# Altium PCB SM_thruster_ctrl_and_pressure_sensor.PcbDoc
Units mm, origin at the board's own origin, x right, y up, seen from the top; angles counter-clockwise.
Board outline 53.85 x 64.14 mm, 2 copper layers (Top Layer, Bottom Layer); 28 components, 25 nets, 116 pads, 10 vias.
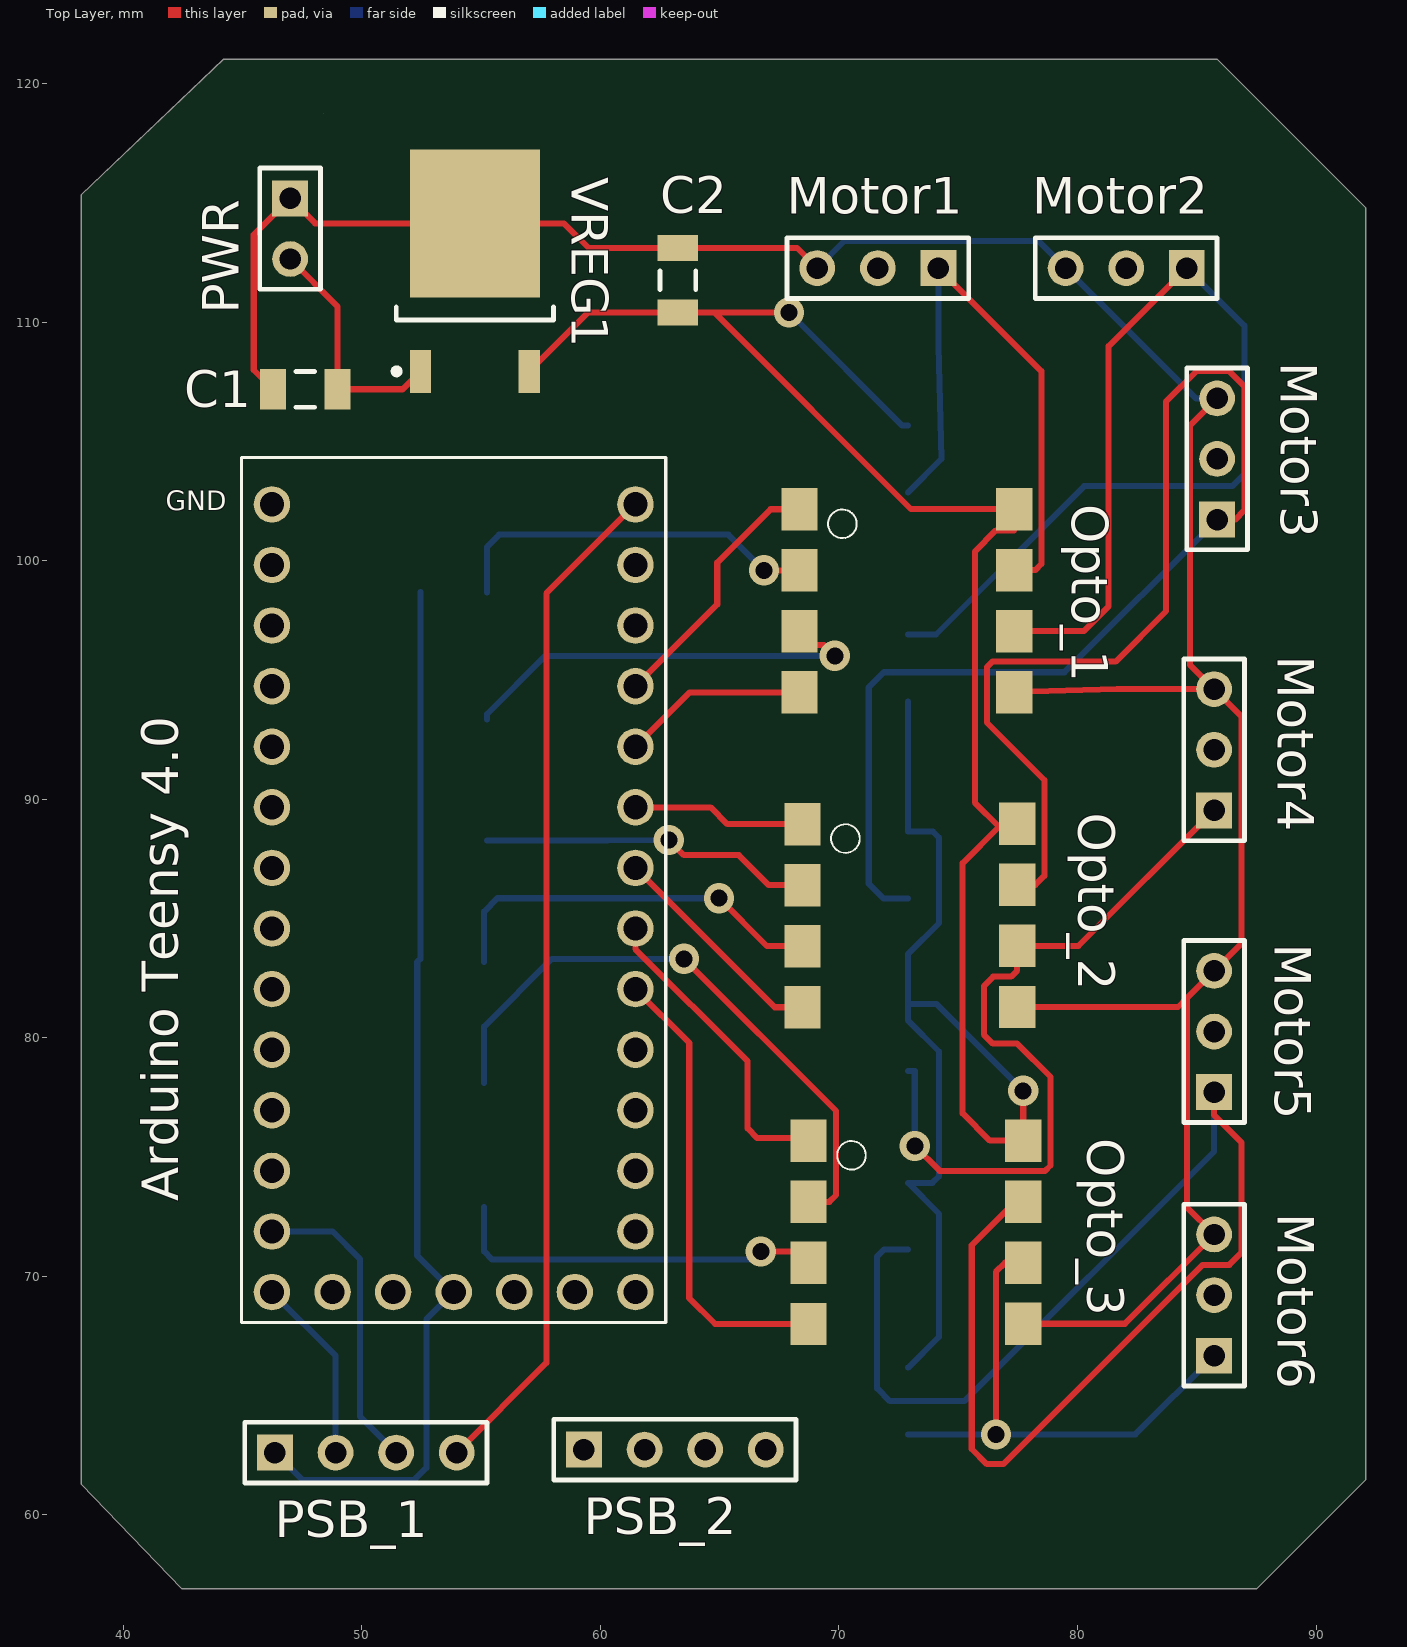
[diagram p0: Top Layer view]
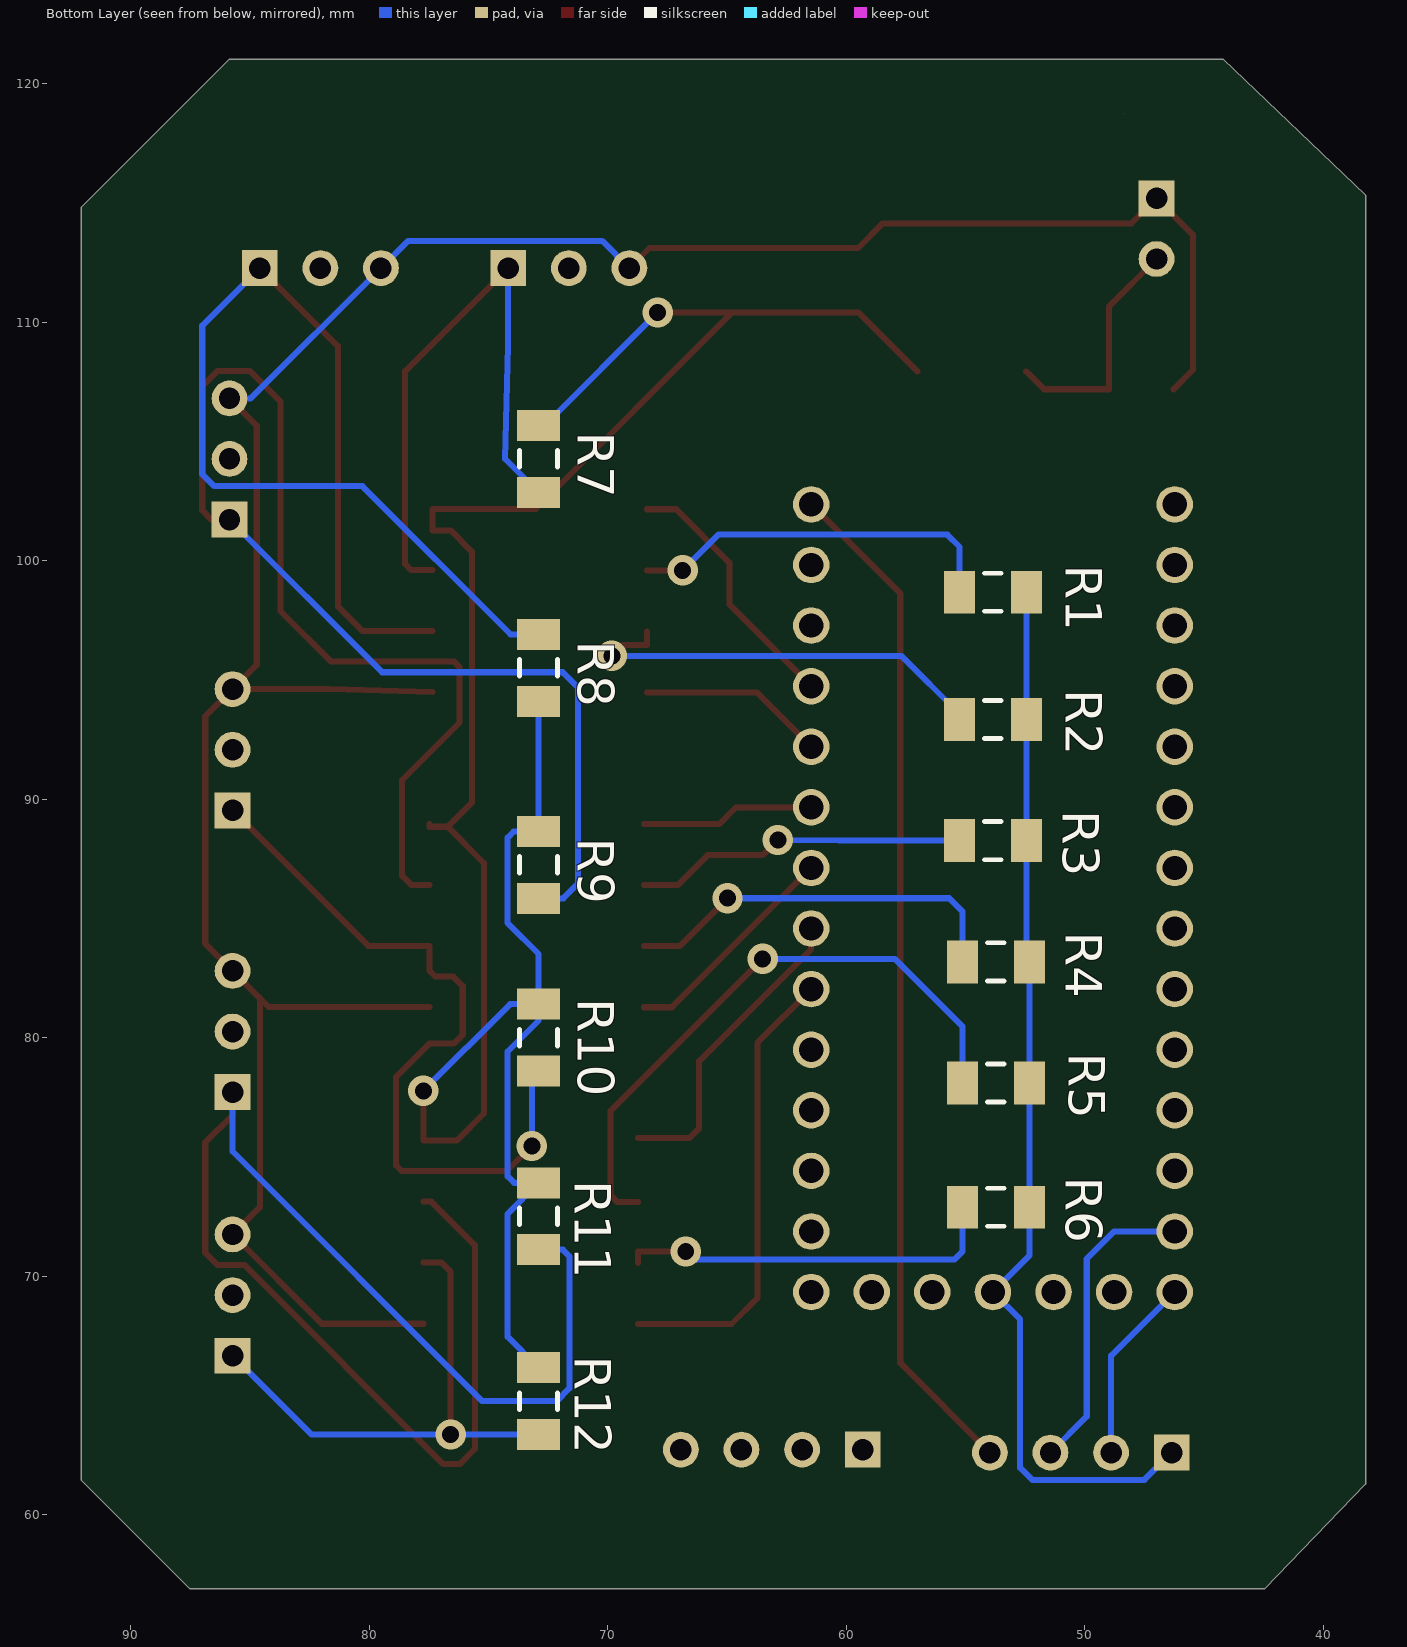
[diagram p1: Bottom Layer view, seen from below]

## Layer stack, top to bottom
Top Solder: solder mask 0.0102, Solder Resist, Dk 3.5
Top Layer: signal copper 0.0356
Dielectric 1: dielectric 0.32, FR-4, Dk 4.8
Bottom Layer: signal copper 0.0356
Bottom Solder: solder mask 0.0102, Solder Resist, Dk 3.5

## Board outline
87.503,56.896 92.075,61.468 92.075,114.808 85.852,121.031 44.206,121.031 38.227,115.332 38.227,61.289 42.463,56.896
cut-out: 48.387,118.745
cut-out: 72.517,129.794

## Design rules (kind name [scope] priority, off if disabled: settings)
Clearance [All] p1: gap=0.254 ignorepadtopadclearanceinfootprint=FALSE except(0: Arc-Hole Track-Hole SMDPad-Hole THPad-Hole Via-Hole Fill-Hole Poly-Hole Region-Hole Text-Hole)
PolygonConnect [All] p1: connectstyle=Relief reliefconductorwidth=0.254 reliefentries=4 polygonreliefangle="90 Angle" airgapwidth=0.254
RoomDefinition SM_thruster_ctrl_and_pressure_sensor [InComponentClass('SM_thruster_ctrl_and_pressure_sensor')] p1: confinementstyle=ConfineIn formatcopy=TRUE lockcomponents=FALSE outline 179.451,25.527 448.183,25.527 448.183,65.786 179.451,65.786
RoutingVias [All] p1: holewidth=0.711 width=1.27 viastyle="Through Hole" minholewidth=0.711 minwidth=1.27 maxholewidth=0.711 maxwidth=1.27
SolderMaskExpansion [All] p1: expansion=0.102
Width [All] p1: maxlimit=0.254 minlimit=0.254 preferedwidth=0.254
30 further rules are at their usual default settings.

## Components (designator, comment, footprint, x,y, rotation, side; value= is the part's Value field where it differs from the comment)
"Arduino Teensy 4.0" "DEV-15583" MODULE_DEV-15583 53.848,85.852 r0 top
C1 "Cap Semi" C1206 47.625,107.188 r180 top value=330nF
C2 "Cap Semi" C1206 63.246,111.76 r270 top value=100nF
Motor1 "Header 3" HDR1X3 74.168,112.268 r180 top
Motor2 "Header 3" HDR1X3 84.582,112.268 r180 top
Motor3 "Header 3" HDR1X3 85.852,101.727 r90 top
Motor4 "Header 3" HDR1X3 85.725,89.535 r90 top
Motor5 "Header 3" HDR1X3 85.725,77.724 r90 top
Motor6 "Header 3" HDR1X3 85.725,66.675 r90 top
Opto_1 "HCPL2531 Surface Mount" HCPL2531 77.343,99.048 r90 top
Opto_2 "HCPL2531 Surface Mount" HCPL2531 77.47,85.852 r90 top
Opto_3 "HCPL2531 Surface Mount" HCPL2531 77.724,72.572 r90 top
PSB_1 "Header 4" HDR1X4 46.355,62.611 r0 top (schematic designator "Pressure Sensor Board")
PSB_2 "Header 4" HDR1X4 59.309,62.738 r0 top (schematic designator "Psb pin")
PWR "Header 2" HDR1X2 46.99,115.189 r270 top (schematic designator Battery?)
R1 "300" RESC3216X70X50NL20T25 53.848,98.679 r0 bottom
R2 "300" RESC3216X70X50NL20T25 53.848,93.345 r0 bottom
R3 "300" RESC3216X70X50NL20T25 53.848,88.265 r0 bottom
R4 "300" RESC3216X70X50NL20T25 53.721,83.185 r0 bottom
R5 "300" RESC3216X70X50NL20T25 53.721,78.105 r0 bottom
R6 "300" RESC3216X70X50NL20T25 53.721,72.898 r0 bottom
R7 "4k" RESC3216X70X50NL20T25 72.898,104.267 r90 bottom
R8 "4k" RESC3216X70X50NL20T25 72.898,95.507 r270 bottom
R9 "4k" RESC3216X70X50NL20T25 72.898,87.249 r90 bottom
R10 "4k" RESC3216X70X50NL20T25 72.898,80.01 r90 bottom
R11 "4k" RESC3216X70X50NL20T25 72.898,72.517 r90 bottom
R12 "4k" RESC3216X70X50NL20T25 72.898,64.773 r90 bottom
VREG1 "L78M05CDT-TR" TO-252_L 54.737,112.141 r90 top

## Footprints (in the part's own frame and the unit in brackets; to place one, negate y for a bottom-side part, rotate by r counter-clockwise, add the part's x,y. Pads: shape width x height; smd on the part's side, far side on the other; paste and mask are expansions set on the pad)
C1206 [mm] "Chip Capacitor, Body 3.2x1.6mm, IPC High Density"
  rect 1.1x1.7 smd: 1(-1.35,0) 2(1.35,0)
  silkscreen extent -0.4,-0.75 0.4,0.75, body extent -1.7,-0.9 1.7,0.9, height 1.3
HCPL2531 [mm] "HCPL2531 optocoupler"
  rect 1.78x1.52 smd: 1(3.11,9) 2(0.55,9) 3(-2.01,9) 4(-4.57,9) 5(-4.56,0) 6(-2,0) 7(0.56,0) 8(3.12,0)
  silkscreen extent 1.9,6.6 3.1,7.8
HDR1X2 [mm] "Connector; Header; 2 Position"
  rect 1.5x1.5 hole 0.9: 1(0,0)
  round 1.5 hole 0.9: 2(2.54,0)
  silkscreen extent -1.27,-1.27 3.81,1.27
HDR1X3 [mm] "Connector; Header; 3 Position"
  rect 1.5x1.5 hole 0.9: 1(0,0)
  round 1.5 hole 0.9: 2(2.54,0) 3(5.08,0)
  silkscreen extent -1.27,-1.27 6.35,1.27
HDR1X4 [mm] "Connector; Header; 4 Position"
  rect 1.5x1.5 hole 0.9: 1(0,0)
  round 1.5 hole 0.9: 2(2.54,0) 3(5.08,0) 4(7.62,0)
  silkscreen extent -1.27,-1.27 8.89,1.27
MODULE_DEV-15583 [mm]
  round 1.53 hole 1.02: 0(-7.62,13.97) 1(-7.62,11.43) 2(-7.62,8.89) 3(-7.62,6.35) 3.3V_1(-2.54,-16.51) 3.3V_2(7.62,11.43) 4(-7.62,3.81) 5(-7.62,1.27) 6(-7.62,-1.27) 7(-7.62,-3.81) 8(-7.62,-6.35) 9(-7.62,-8.89) 10(-7.62,-11.43) 11(-7.62,-13.97) 12(-7.62,-16.51) 13(7.62,-16.51) 14(7.62,-13.97) 15(7.62,-11.43) 16(7.62,-8.89) 17(7.62,-6.35) 18(7.62,-3.81) 19(7.62,-1.27) 20(7.62,1.27) 21(7.62,3.81) 22(7.62,6.35) 23(7.62,8.89) G1(-7.62,16.51) G2(0,-16.51) G3(7.62,13.97) ON-OFF(5.08,-16.51) PGM(2.54,-16.51) VBAT(-5.08,-16.51) VIN(7.62,16.51)
  silkscreen extent -8.89,-17.78 8.89,18.48
RESC3216X70X50NL20T25 [mm] "Chip Resistor, 2-Leads, Body 3.20x1.60mm, IPC Medium Density"
  rect 1.3x1.8 smd: 1(-1.4,0) 2(1.4,0)
  silkscreen extent -0.35,-0.8 0.35,0.8, body extent -1.7,-0.9 1.7,0.9, height 0.7
TO-252_L [mm] "D-PAK, 4-Leads, Body 6.1x6.5mm, Pitch 2.28mm, Lead Span 9.7mm, IPC High Density"
  rect 1.8x0.9 smd: 1(-4.2,2.28) 3(-4.2,-2.28)
  rect 6.2x5.45 smd: 4(2,0)
  silkscreen extent -4.32,-3.3 -1.5,3.4, body extent -2.05,-3.3 4.15,3.3, height 2.4

## Part data
"Arduino Teensy 4.0": "RT1062 Teensy 4.0 i.MX ARM® Cortex®-M7 MPU Embedded Evaluation Board", Package=None, ComponentLink1Description="Download Link", ComponentLink1URL=https://www.snapeda.com/parts/DEV-15583/SparkFun%20Electronics/view-part/?company=Subbots&amp;ref=search&amp;t=teensy+4.0, Digi-Key_Part_Number=1568-DEV-15583-ND, Digi-Key_Purchase_URL=https://www.digikey.com/product-detail/en/sparkfun-electronics/DEV-15583/1568-DEV-15583-ND/10384551?utm_source=snapeda&utm_medium=aggregator&utm_campaign=symbol, MF="SparkFun Electronics", MP=DEV-15583, SnapEDA_Link=https://www.snapeda.com/parts/DEV-15583/SparkFun%20Electronics/view-part/4001229/?ref=snap
C1 C2: "Capacitor (Semiconductor SIM Model)", LatestRevisionDate=29-May-2009, LatestRevisionNote="IPC-7351 Footprint Added.", PackageDescription="Chip Capacitor", PackageReference=C1206, Published=8-Jun-2000, Publisher="Altium Limited"
Motor1 Motor2 Motor3 Motor4 Motor5 Motor6: "Header, 3-Pin", LatestRevisionDate=17-Jul-2002, LatestRevisionNote="Re-released for DXP Platform.", Publisher="Altium Limited"
Opto_1 Opto_2 Opto_3: library part HCPL2531, ComponentLink1Description=Datasheet, ComponentLink1URL=https://www.onsemi.com/pub/Collateral/HCPL2531-D.PDF
PSB_1 PSB_2: "Header, 4-Pin", LatestRevisionDate=17-Jul-2002, LatestRevisionNote="Re-released for DXP Platform.", Publisher="Altium Limited"
PWR: "Header, 2-Pin", LatestRevisionDate=17-Jul-2002, LatestRevisionNote="Re-released for DXP Platform.", Publisher="Altium Limited"
R1 R3 R5 R7 R9 R11: library part CMP-2003-04450-1, Manufacturer=Panasonic, Part Number=ERA8AEB301V
R2 R4 R6 R8 R10 R12: library part CMP-2003-04450-1, "ERA8AEB301V", Manufacturer=Panasonic, Part Number=ERA8AEB301V
VREG1: library part CMP-0244-00178-1, "Positive Voltage Regulator, 5V, 3-Pin DPAK, Tape and Reel", ComponentLink1Description="Manufacturer URL", ComponentLink1URL=http://www.st.com, ComponentLink2Description=Datasheet, ComponentLink2URL=http://www.st.com/internet/com/TECHNICAL_RESOURCES/TECHNICAL_LITERATURE/DATASHEET/CD00000447.pdf, DatasheetVersion=1/11/2010, PackageDescription="3-Pin Transistor Outline Package 2.28 mm Pitch, 9.7 mm Lead Span (DPAK)", PackageReference=TO-252, PackageVersion=2011

## Via types
v1: diameter 1.27, hole 0.711, Top Layer to Bottom Layer, 10 vias

## Nets (pads, with @x,y where several pads share a name; then routed paths per layer and width w, separated by ;. In a path a pad name is that pad's centre, name@x,y a point inside that pad or via, vN(x,y) a via of type N, cw(c..) or ccw(c..) an arc to the next point about the centre after c; other vN are vias at no path point)
5V: "Arduino Teensy 4.0.VIN" PSB_1.4 | length 42.9
  Top Layer w0.254: PSB_1.4 57.734,66.37 57.734,98.628 61.468,102.362
5Vcc: C2.2 Opto_1.8 Opto_2.8 Opto_3.8 R7.2 R8.2 R9.2 R10.2 R11.2 R12.2 VREG1.3 | length 107
  Top Layer w0.254: VREG1.3 59.486,110.41 C2.2 64.77,110.41 ; v1(67.905,110.41) 64.77,110.41 ; Opto_2.8 77.47,88.849 76.708,88.849 ; v1(77.724,77.778) Opto_3.8 76.329,75.692 75.184,76.837 75.184,87.325 76.708,88.849 ; 64.77,110.41 73.012,102.168 Opto_1.8 77.343,101.27 76.581,101.27 75.694,100.383 75.694,89.863 76.708,88.849
  Bottom Layer w0.254: v1(67.905,110.41) 72.648,105.667 R7.2 ; R12.2 74.193,67.468 74.193,72.622 R11.2 73.914,73.917 74.193,74.196 74.193,79.426 72.898,80.721 R10.2 ; R8.2 R9.2 73.936,88.649 74.193,88.392 74.193,84.811 72.898,83.515 R10.2 ; v1(77.724,77.778) 74.092,81.41 R10.2
GND: C1.2 C2.1 Motor1.3 Motor2.3 Motor3.3 Motor4.3 Motor5.3 Motor6.3 Opto_1.5 Opto_2.5 Opto_3.5 PWR.1 VREG1.4 | length 115.5
  Top Layer w0.254: C1.2 45.466,107.997 45.466,113.665 PWR.1 48.038,114.141 VREG1.4 58.471,114.141 59.502,113.11 C2.1 68.246,113.11 Motor1.3 ; Opto_1.5 81.661,94.615 Motor4.3 ; Opto_2.5 84.213,81.292 84.582,81.661 ; Opto_3.5 81.982,68.012 Motor6.3 84.582,72.898 84.582,81.661 ; Motor2.3@79.383,112.387 Motor2.3@79.621,112.387 ; Motor3.3 84.709,105.664 84.709,95.631 Motor4.3 ; 84.582,81.661 Motor5.3 86.868,83.947 86.868,93.472 Motor4.3
  Bottom Layer w0.254: Motor1.3 70.231,113.411 78.359,113.411 Motor2.3 84.963,106.807 Motor3.3
"MCU GND": "Arduino Teensy 4.0.G2" PSB_1.1 R1.1 R2.1 R3.1 R4.1 R5.1 R6.1 | length 44.9
  Bottom Layer w0.254: PSB_1.1 47.498,61.468 52.197,61.468 52.705,61.976 52.705,68.199 53.848,69.342 52.321,70.869 R6.1 R5.1 R4.1 52.448,83.312 R3.1 R2.1 R1.1
"NetArduino Teensy 4.0_11": "Arduino Teensy 4.0.11" PSB_1.3 | length 12.9
  Bottom Layer w0.254: 46.228,71.882 48.768,71.882 49.914,70.736 49.914,64.132 PSB_1.3
"NetArduino Teensy 4.0_12": "Arduino Teensy 4.0.12" PSB_1.2 | length 7.8
  Bottom Layer w0.254: 46.228,69.342 48.895,66.675 PSB_1.2
"NetArduino Teensy 4.0_18": "Arduino Teensy 4.0.18" Opto_3.4 | length 19.3
  Top Layer w0.254: 61.468,82.042 63.722,79.788 63.722,69.088 64.808,68.002 Opto_3.4
"NetArduino Teensy 4.0_19": "Arduino Teensy 4.0.19" Opto_3.1 | length 13.1
  Top Layer w0.254: 61.468,84.582 61.468,83.718 66.167,79.019 66.167,76.2 66.57,75.797 66.78,75.797 66.782,75.799 Opto_3.1@68.724,75.799
"NetArduino Teensy 4.0_20": "Arduino Teensy 4.0.20" Opto_2.4 | length 9.4
  Top Layer w0.254: 61.468,87.122 67.308,81.282 Opto_2.4
"NetArduino Teensy 4.0_21": "Arduino Teensy 4.0.21" Opto_2.1 | length 7.3
  Top Layer w0.254: 61.468,89.662 64.618,89.662 65.318,88.962 Opto_2.1
"NetArduino Teensy 4.0_22": "Arduino Teensy 4.0.22" Opto_1.4 | length 7.8
  Top Layer w0.254: 61.468,92.202 63.744,94.478 Opto_1.4
"NetArduino Teensy 4.0_23": "Arduino Teensy 4.0.23" Opto_1.1 | length 11
  Top Layer w0.254: 61.468,94.742 64.897,98.171 64.897,99.924 67.131,102.158 Opto_1.1
NetBattery?_2: C1.1 PWR.2 VREG1.1 | length 10.1
  Top Layer w0.254: PWR.2 48.975,110.664 C1.1 51.704,107.188 VREG1.1
NetMotor1_1: Motor1.1 Opto_1.7 R7.1 | length 25.4
  Top Layer w0.254: Motor1.1 78.486,107.95 78.486,99.862 78.232,99.608 Opto_1.7
  Bottom Layer w0.254: R7.1 74.295,104.264 74.168,109.017 Motor1.1
NetMotor2_1: Motor2.1 Opto_1.6 R8.1 | length 46.4
  Top Layer w0.254: Opto_1.6 80.264,97.048 81.305,98.089 81.305,108.991 Motor2.1
  Bottom Layer w0.254: R8.1 74.066,96.907 80.283,103.124 86.487,103.124 86.995,103.632 86.995,109.855 Motor2.1
NetMotor3_1: Motor3.1 Opto_2.7 R9.1 | length 66.6
  Top Layer w0.254: Opto_2.7 78.232,86.412 78.613,86.793 78.613,90.807 76.202,93.218 76.202,95.536 76.434,95.768 81.595,95.768 83.718,97.892 83.718,106.68 84.988,107.95 86.36,107.95 86.995,107.315 86.995,102.108 86.614,101.727 Motor3.1
  Bottom Layer w0.254: R9.1 71.86,85.849 71.247,86.462 71.247,94.691 71.882,95.326 79.451,95.326 Motor3.1
NetMotor4_1: Motor4.1 Opto_2.6 R10.1 | length 32.2
  Top Layer w0.254: v1(73.177,75.463) 74.22,74.421 78.642,74.421 78.867,74.646 78.867,78.359 77.47,79.756 76.454,79.756 76.073,80.137 76.073,82.169 76.467,82.563 77.216,82.563 77.47,82.817 Opto_2.6 80.042,83.852 Motor4.1
  Bottom Layer w0.254: R10.1 73.177,78.61 v1(73.177,75.463)
NetMotor5_1: Motor5.1 Opto_3.7 R11.1 | length 62
  Top Layer w0.254: Opto_3.7 77.394,73.132 75.565,71.303 75.565,62.763 76.2,62.128 76.886,62.128 85.242,70.485 86.36,70.485 86.868,70.993 86.868,75.616 85.725,76.759 Motor5.1
  Bottom Layer w0.254: R11.1 71.882,71.117 71.603,70.838 71.603,65.303 72.136,64.77 75.26,64.77 85.725,75.235 Motor5.1
NetMotor6_1: Motor6.1 Opto_3.6 R12.1 | length 22.3
  Top Layer w0.254: v1(76.581,63.373) 76.581,70.191 76.962,70.572 Opto_3.6
  Bottom Layer w0.254: R12.1 v1(76.581,63.373) 82.423,63.373 Motor6.1
NetOpto_1_2: Opto_1.2 R1.2 | length 15.8
  Top Layer w0.254: v1(66.853,99.598) Opto_1.2
  Bottom Layer w0.254: R1.2 55.248,100.584 55.756,101.092 65.359,101.092 v1(66.853,99.598)
NetOpto_1_3: Opto_1.3 R2.2 | length 18.1
  Top Layer w0.254: Opto_1.3 68.343,96.469 69.367,96.469 v1(69.825,96.012)
  Bottom Layer w0.254: R2.2 55.248,93.574 57.686,96.012 v1(69.825,96.012)
NetOpto_2_2: Opto_2.2 R3.2 | length 14
  Top Layer w0.254: v1(62.865,88.29) 63.5,87.655 65.803,87.655 67.056,86.402 Opto_2.2
  Bottom Layer w0.254: R3.2 60.3,88.265 v1(62.865,88.29)
NetOpto_2_3: Opto_2.3 R4.2 | length 16.5
  Top Layer w0.254: v1(64.973,85.852) 66.983,83.842 Opto_2.3
  Bottom Layer w0.254: R4.2 55.121,85.293 55.68,85.852 v1(64.973,85.852)
NetOpto_3_2: Opto_3.2 R5.2 | length 25.7
  Top Layer w0.254: v1(63.5,83.312) 69.875,76.937 69.875,73.401 69.596,73.122 Opto_3.2
  Bottom Layer w0.254: R5.2 55.121,80.47 57.963,83.312 v1(63.5,83.312)
NetOpto_3_3: Opto_3.3 R6.2 | length 16.2
  Top Layer w0.254: v1(66.726,71.044) 68.724,71.044 Opto_3.3
  Bottom Layer w0.254: R6.2 55.121,71.044 55.451,70.714 66.396,70.714 v1(66.726,71.044)
pads on no net: "Arduino Teensy 4.0.0" "Arduino Teensy 4.0.1" "Arduino Teensy 4.0.2" "Arduino Teensy 4.0.3" "Arduino Teensy 4.0.3.3V_1" "Arduino Teensy 4.0.3.3V_2" "Arduino Teensy 4.0.4" "Arduino Teensy 4.0.5" "Arduino Teensy 4.0.6" "Arduino Teensy 4.0.7" "Arduino Teensy 4.0.8" "Arduino Teensy 4.0.9" "Arduino Teensy 4.0.10" "Arduino Teensy 4.0.13" "Arduino Teensy 4.0.14" "Arduino Teensy 4.0.15" "Arduino Teensy 4.0.16" "Arduino Teensy 4.0.17" "Arduino Teensy 4.0.G1" "Arduino Teensy 4.0.G3" "Arduino Teensy 4.0.ON-OFF" "Arduino Teensy 4.0.PGM" "Arduino Teensy 4.0.VBAT" Motor1.2 Motor2.2 Motor3.2 Motor4.2 Motor5.2 Motor6.2 PSB_2.1 PSB_2.2 PSB_2.3 PSB_2.4

## Text inside footprints (layer, text, board x,y; h text height)
"Arduino Teensy 4.0": Top Overlay "GND" at 41.783,102.108 h0.81; Mechanical 13 "GND" at 41.783,102.108 h0.81